# EAGLE board tiny2313marquee_1 (EAGLE 6.2)

Size 55.88 x 51.44 mm. Coordinates in mm from the lower left corner, seen from the top.
Outline: 0,0 0,51.44 55.88,51.44 55.88,0 0,0
Copper layers (1*16): Top 0.035mm / dielectric 1.5mm / Bottom 0.035mm
Design rules: minimum track width 10mil, minimum drill 12mil, track to track 9mil, track to pad 9mil, pad to pad 9mil, via to via 9mil, smd to smd 0mil, copper to edge 10mil, drill to drill 10mil, minimum pad ring 10mil, minimum via ring 6mil, stop-mask expansion 2mil, vias tented up to drill 100mil, thermal gap 10mil
Holes 3.2 mm at 5.08,5.08 5.08,46.35 50.8,5.08 50.8,46.35

## Footprints (pad centres in the part's own frame; a part is rotated, then mirrored left to right if it is on the bottom)
LED3MM = drill 0.813 octagon: A -1.27,0; K 1.27,0
1X01 = drill 1.016 octagon: 1 0,0
1X04_LOCK = drill 1.016 pad 1.88 square: 1 0,0.127 | drill 1.016 pad 1.88: 2 2.54,-0.127; 3 5.08,0.127; 4 7.62,-0.127
1X06_LOCK = drill 1.016 pad 1.88: 1 0,0; 2 2.54,-0.254; 3 5.08,0; 4 7.62,-0.254; 5 10.16,0; 6 12.7,-0.254

## Placement (x,y rotation side)
00  [LED3MM]  2.54,2.54 0 top
0A  [LED3MM]  53.34,2.54 0 top
01  [LED3MM]  7.62,2.54 0 top
1A  [LED3MM]  53.34,7.62 0 top
02  [LED3MM]  12.7,2.54 0 top
2A  [LED3MM]  53.34,12.7 0 top
03  [LED3MM]  17.78,2.54 0 top
3A  [LED3MM]  53.34,17.78 0 top
04  [LED3MM]  22.86,2.54 0 top
4A  [LED3MM]  53.34,22.86 0 top
05  [LED3MM]  27.94,2.54 0 top
5A  [LED3MM]  53.34,28.57 0 top
06  [LED3MM]  33.02,2.54 0 top
6A  [LED3MM]  53.34,33.66 0 top
07  [LED3MM]  38.1,2.54 0 top
7A  [LED3MM]  53.34,38.73 0 top
08  [LED3MM]  43.18,2.54 0 top
8A  [LED3MM]  53.34,43.81 0 top
09  [LED3MM]  48.26,2.54 0 top
9A  [LED3MM]  53.34,48.9 0 top
10  [LED3MM]  2.54,7.62 0 top
11  [LED3MM]  7.62,7.62 0 top
12  [LED3MM]  12.7,7.62 0 top
13  [LED3MM]  17.78,7.62 0 top
14  [LED3MM]  22.86,7.62 0 top
15  [LED3MM]  27.94,7.62 0 top
16  [LED3MM]  33.02,7.62 0 top
17  [LED3MM]  38.1,7.62 0 top
18  [LED3MM]  43.18,7.62 0 top
19  [LED3MM]  48.26,7.62 0 top
20  [LED3MM]  2.54,12.7 0 top
21  [LED3MM]  7.62,12.7 0 top
22  [LED3MM]  12.7,12.7 0 top
23  [LED3MM]  17.78,12.7 0 top
24  [LED3MM]  22.86,12.7 0 top
25  [LED3MM]  27.94,12.7 0 top
26  [LED3MM]  33.02,12.7 0 top
27  [LED3MM]  38.1,12.7 0 top
28  [LED3MM]  43.18,12.7 0 top
29  [LED3MM]  48.26,12.7 0 top
30  [LED3MM]  2.54,17.78 0 top
31  [LED3MM]  7.62,17.78 0 top
32  [LED3MM]  12.7,17.78 0 top
33  [LED3MM]  17.78,17.78 0 top
34  [LED3MM]  22.86,17.78 0 top
35  [LED3MM]  27.94,17.78 0 top
36  [LED3MM]  33.02,17.78 0 top
37  [LED3MM]  38.1,17.78 0 top
38  [LED3MM]  43.18,17.78 0 top
39  [LED3MM]  48.26,17.78 0 top
40  [LED3MM]  2.54,22.86 0 top
41  [LED3MM]  7.62,22.86 0 top
42  [LED3MM]  12.7,22.86 0 top
43  [LED3MM]  17.78,22.86 0 top
44  [LED3MM]  22.86,22.86 0 top
45  [LED3MM]  27.94,22.86 0 top
46  [LED3MM]  33.02,22.86 0 top
47  [LED3MM]  38.1,22.86 0 top
48  [LED3MM]  43.18,22.86 0 top
49  [LED3MM]  48.26,22.86 0 top
50  [LED3MM]  2.54,28.57 0 top
51  [LED3MM]  7.62,28.57 0 top
52  [LED3MM]  12.7,28.57 0 top
53  [LED3MM]  17.78,28.57 0 top
54  [LED3MM]  22.86,28.57 0 top
55  [LED3MM]  27.94,28.57 0 top
56  [LED3MM]  33.02,28.57 0 top
57  [LED3MM]  38.1,28.57 0 top
58  [LED3MM]  43.18,28.57 0 top
59  [LED3MM]  48.26,28.57 0 top
60  [LED3MM]  2.54,33.66 0 top
61  [LED3MM]  7.62,33.66 0 top
62  [LED3MM]  12.7,33.66 0 top
63  [LED3MM]  17.78,33.66 0 top
64  [LED3MM]  22.86,33.66 0 top
65  [LED3MM]  27.94,33.66 0 top
66  [LED3MM]  33.02,33.66 0 top
67  [LED3MM]  38.1,33.66 0 top
68  [LED3MM]  43.18,33.66 0 top
69  [LED3MM]  48.26,33.66 0 top
70  [LED3MM]  2.54,38.73 0 top
71  [LED3MM]  7.62,38.73 0 top
72  [LED3MM]  12.7,38.73 0 top
73  [LED3MM]  17.78,38.73 0 top
74  [LED3MM]  22.86,38.73 0 top
75  [LED3MM]  27.94,38.73 0 top
76  [LED3MM]  33.02,38.73 0 top
77  [LED3MM]  38.1,38.73 0 top
78  [LED3MM]  43.18,38.73 0 top
79  [LED3MM]  48.26,38.73 0 top
80  [LED3MM]  2.54,43.81 0 top
81  [LED3MM]  7.62,43.81 0 top
82  [LED3MM]  12.7,43.81 0 top
83  [LED3MM]  17.78,43.81 0 top
84  [LED3MM]  22.86,43.81 0 top
85  [LED3MM]  27.94,43.81 0 top
86  [LED3MM]  33.02,43.81 0 top
87  [LED3MM]  38.1,43.81 0 top
88  [LED3MM]  43.18,43.81 0 top
89  [LED3MM]  48.26,43.81 0 top
90  [LED3MM]  2.54,48.9 0 top
91  [LED3MM]  7.62,48.9 0 top
92  [LED3MM]  12.7,48.9 0 top
93  [LED3MM]  17.78,48.9 0 top
94  [LED3MM]  22.86,48.9 0 top
95  [LED3MM]  27.94,48.9 0 top
96  [LED3MM]  33.02,48.9 0 top
97  [LED3MM]  38.1,48.9 0 top
98  [LED3MM]  43.18,48.9 0 top
99  [LED3MM]  48.26,48.9 0 top
H0  [1X01]  15.24,5.08 0 top
H1  [1X01]  17.78,5.08 0 top
H2  [1X01]  20.32,5.08 0 top
H3  [1X01]  22.86,5.08 0 top
H4  [1X01]  25.4,5.08 0 top
H5  [1X01]  27.94,5.08 0 top
H6  [1X01]  30.48,5.08 0 top
H7  [1X01]  33.02,5.08 0 top
H8  [1X01]  35.56,5.08 0 top
H9  [1X01]  38.1,5.08 0 top
H10  [1X01]  40.64,5.08 0 top
H12  [1X04_LOCK]  43.18,10.16 180 bottom
H15  [1X06_LOCK]  22.86,10.16 0 bottom

## Library data of the parts
00 0A 01 1A 02 2A 03 3A 04 4A 05 5A 06 6A 07 7A 08 8A 09 9A 10-99 = led
H0 H1-H10 = pinhead
H12 H15 = SparkFun

## Nets
D: 00.A 0A.K 1A.K 2A.K 3A.K 4A.K 5A.K 6A.K 7A.K 8A.K 9A.K 11.A 22.A 33.A 44.A 55.A 66.A 77.A 88.A 99.A H10.1 H15.2
S0: 00.K 0A.A 01.A 02.A 03.A 04.A 05.A 06.A 07.A 08.A 09.A 10.K 20.K 30.K 40.K 50.K 60.K 70.K 80.K 90.K H0.1 H15.5
S1: 01.K 1A.A 10.A 11.K 12.A 13.A 14.A 15.A 16.A 17.A 18.A 19.A 21.K 31.K 41.K 51.K 61.K 71.K 81.K 91.K H1.1
S2: 02.K 2A.A 12.K 20.A 21.A 22.K 23.A 24.A 25.A 26.A 27.A 28.A 29.A 32.K 42.K 52.K 62.K 72.K 82.K 92.K H2.1
S3: 03.K 3A.A 13.K 23.K 30.A 31.A 32.A 33.K 34.A 35.A 36.A 37.A 38.A 39.A 43.K 53.K 63.K 73.K 83.K 93.K H3.1
S4: 04.K 4A.A 14.K 24.K 34.K 40.A 41.A 42.A 43.A 44.K 45.A 46.A 47.A 48.A 49.A 54.K 64.K 74.K 84.K 94.K H4.1
S5: 05.K 5A.A 15.K 25.K 35.K 45.K 50.A 51.A 52.A 53.A 54.A 55.K 56.A 57.A 58.A 59.A 65.K 75.K 85.K 95.K H5.1 H12.2
S6: 06.K 6A.A 16.K 26.K 36.K 46.K 56.K 60.A 61.A 62.A 63.A 64.A 65.A 66.K 67.A 68.A 69.A 76.K 86.K 96.K H6.1
S7: 07.K 7A.A 17.K 27.K 37.K 47.K 57.K 67.K 70.A 71.A 72.A 73.A 74.A 75.A 76.A 77.K 78.A 79.A 87.K 97.K H7.1
S8: 08.K 8A.A 18.K 28.K 38.K 48.K 58.K 68.K 78.K 80.A 81.A 82.A 83.A 84.A 85.A 86.A 87.A 88.K 89.A 98.K H8.1 H15.6
S9: 09.K 9A.A 19.K 29.K 39.K 49.K 59.K 69.K 79.K 89.K 90.A 91.A 92.A 93.A 94.A 95.A 96.A 97.A 98.A 99.K H9.1
S$1: H12.4 H15.3
S$2: H15.4
S$3: H12.1 H15.1
S$4: H12.3

## Tracks (layer width: path | path; a pad name or v marks a point on that pad's centre or on a via)
D  (21 unrouted)
S0  (21 unrouted)
S1  (20 unrouted)
S2  (20 unrouted)
S3  (20 unrouted)
S4  (20 unrouted)
S5  (21 unrouted)
S6  (20 unrouted)
S7  (20 unrouted)
S8  (21 unrouted)
S9  (20 unrouted)
S$1  (1 unrouted)
S$3  (1 unrouted)